# Altium PCB Booster_PA_OUT.PcbDoc
Units mm, origin at the board's own origin, x right, y up, seen from the top; angles counter-clockwise.
Board outline 79.5 x 29 mm, 2 copper layers (Top Layer, Bottom Layer), stack 1.071 mm thick; 94 components, 59 nets, 267 pads, 315 vias.
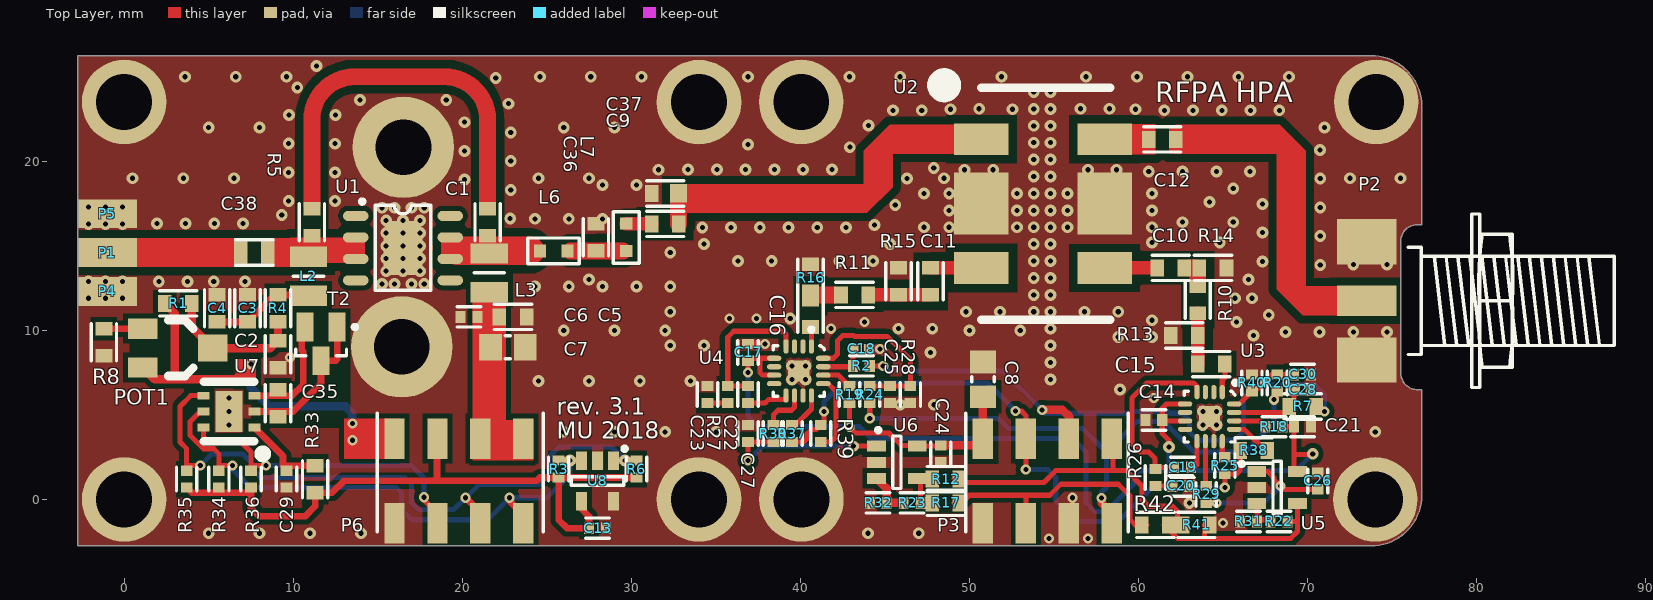
[diagram p0: Top Layer view]
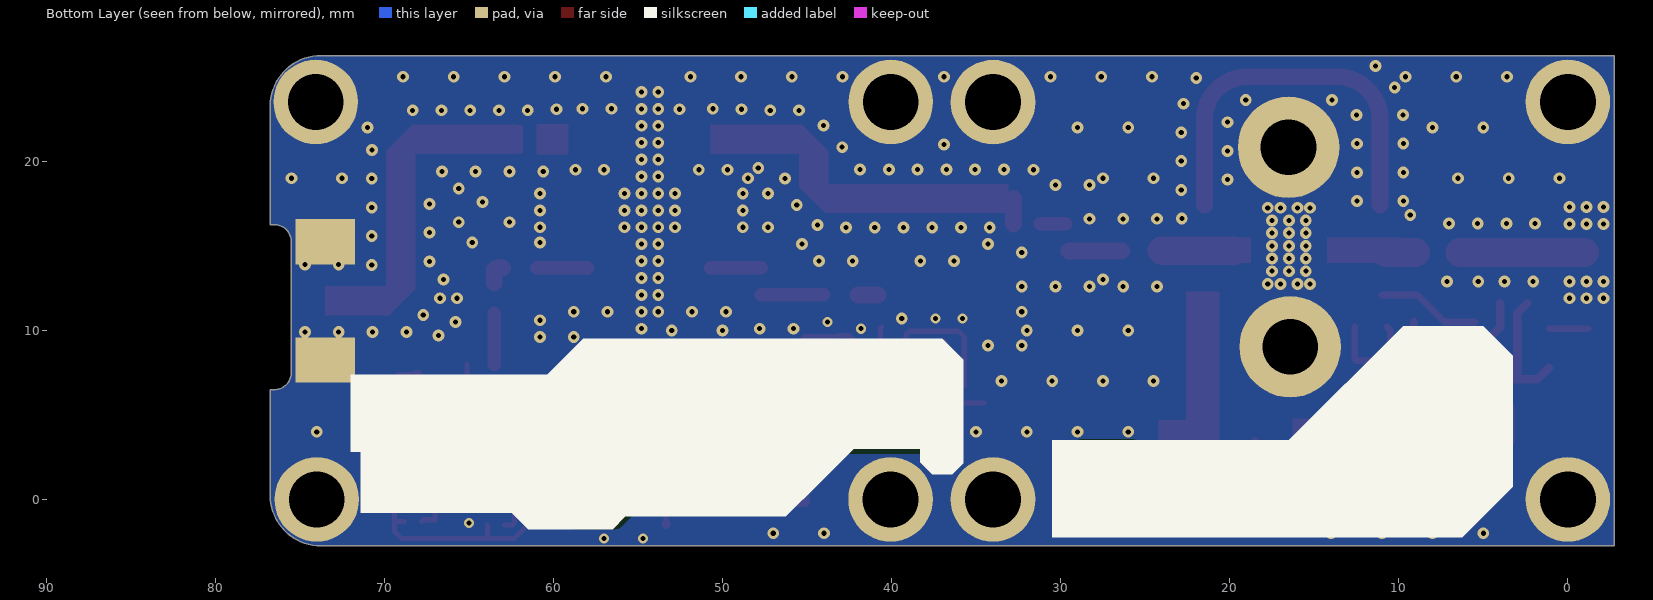
[diagram p1: Bottom Layer view, seen from below]

## Layer stack, top to bottom
Top Solder: solder mask 0.0102, Solder Resist, Dk 3.5
Top Layer: signal copper 0.0356
Dielectric 1: dielectric 1, FR408, Dk 3.67
Bottom Layer: signal copper 0.0356
Bottom Solder: solder mask 0.0102, Solder Resist, Dk 3.5

## Board outline
-2.75,-2.75 -2.75,26.25 73.75,26.25 cw(c73.75,23.25) 76.75,23.25 76.75,16.25 76.5,16.25 ccw(c76.5,15.25) 75.5,15.25 75.5,7.5 ccw(c76.5,7.5) 76.5,6.5 76.75,6.5 76.75,0.25 cw(c73.75,0.25) 73.75,-2.75

## Design rules (kind name [scope] priority, off if disabled: settings)
Clearance Clearance_50_Ohm [InNetClass('50_Ohm') vs InNet('GND')] p1: gap=0.5 ignorepadtopadclearanceinfootprint=FALSE
Clearance [All] p2: gap=0.3 ignorepadtopadclearanceinfootprint=FALSE
Height [All] p1: minheight=0 maxheight=30 prefheight=12.7
HoleSize [All] p1: absolutevalues=TRUE maxlimit=4 minlimit=0.025 maxpercent=80.000 minpercent=20.000
MinimumSolderMaskSliver [All] p1: minsoldermaskwidth=0.1
PolygonConnect [All] p1: connectstyle=Direct reliefconductorwidth=0.254 reliefentries=4 polygonreliefangle="90 Angle" airgapwidth=0.254
RoomDefinition Booster_PA_OUT [InComponentClass('Booster_PA_OUT')] p1: confinementstyle=ConfineIn formatcopy=TRUE lockcomponents=FALSE outline 76.5,27.5 -1,27.5 -1,-2 76.5,-2
RoutingVias [All] p1: holewidth=0.711 width=1.27 viastyle="Through Hole" minholewidth=0.711 minwidth=1.27 maxholewidth=0.711 maxwidth=1.27
SolderMaskExpansion [All] p1: expansion=0.102
Width Width_50_Ohm [InNetClass('50_Ohm')] p1: maxlimit=1.7 minlimit=0.3 preferedwidth=1.7 bottomlayer_minwidth=0 bottomlayer_maxwidth=0 bottomlayer_prefwidth=0 minimp=50.000000 maximp=50.000000 favimp=50.000000
Width [All] p2: maxlimit=2 minlimit=0.2 preferedwidth=0.5 minimp=50.000000 maximp=50.000000 favimp=50.000000
27 further rules are at their usual default settings.

## Classes and differential pairs
net class 50_Ohm: NetC1_1 NetC1_2 NetC9_1 NetC9_2 NetC10_1 NetC10_2 NetC11_1 NetC11_2 NetC12_1 NetC12_2 NetC15_2 NetC16_2 NetC36_2 NetC38_1 NetC38_2

## Components (designator, comment, footprint, x,y, rotation, side; value= is the part's Value field where it differs from the comment)
C1 "470p" 0603_ZE#1 21.5,16.4 r90 top
C2 "4.7u" 0603_ZE#1 9.1,8.6 r90 top
C3 "100n" 0603_ZE#1 7.3,11.3 r270 top
C4 "680p" 0603_ZE#1 5.5,11.3 r270 top
C5 "680p" 0603_ZE#1 23,10.8 r180 top
C6 "100n" 0402_ZE 20.4,10.8 r0 top
C7 "4.7u" chip_c_0805 22.7,9 r180 top
C8 "4.7u" chip_c_0805 50.8,7.1 r270 top
C9 "270p" 0603_ZE#1 32,16.3 r180 top
C10 "2.2n" 0603_ZE#1 61.9,13.7 r180 top
C11 "2.2n" 0603_ZE#1 47.7,12.9 r90 top
C12 "2.2n" 0603_ZE#1 61.4,21.3 r180 top
C13 "100n" 0402_ZE 28,-1.7 r180 top
C14 "100n" 0402_ZE 60.9,4.7 r0 top
C15 "2.2n" 0603_ZE#1 64.3,8 r180 top
C16 "2.2n" 0603_ZE#1 40.6,11 r90 top
C17 "100n" 0402_ZE 36.9,8.7 r270 top
C18 "47n" "CAPC1005X70N - 0402" 43.6,8.9 r0 top
C19 "100n" 0402_ZE 62.6,1.9 r0 top
C20 "100n" 0402_ZE 62.5,0.8 r0 top
C21 "100n" 0402_ZE 69.7,4.3 r180 top
C22 "100n" 0402_ZE 36.9,6.2 r270 top
C23 "100n" 0402_ZE 34.5,6.2 r90 top
C24 "100n" 0402_ZE 48.3,2.7 r90 top
C25 "100n" 0402_ZE 45.3,6.2 r90 top
C26 "100n" 0402_ZE 70.6,1.1 r270 top
C27 "100n" 0402_ZE 36.9,3.9 r270 top
C28 "47n" "CAPC1005X70N - 0402" 69.7,6.5 r0 top
C29 "100n" 0402_ZE 9.6,1.2 r90 top
C30 "dnm" 0402_ZE 69.7,7.4 r180 top
C35 "2.2n" 0603_ZE#1 9.1,5.7 r90 top
C36 "2.7p" 0603_ZE#1 27.9,15.5 r270 top
C37 "0.9p" 0603_ZE#2 32,18.1 r180 top
C38 "3.3n" 0603_ZE#3 7.7,14.6 r180 top
L2 "1uH 2% 1A" INDC2620X100N 10.9,13.2 r270 top
L3 "1uH 2% 1A" INDC2620X100N 21.6,13.4 r270 top
L6 "4.7nH" 0603_IND 25.4,14.7 r0 top
L7 "6.8nH" 0603_IND 29.7,15.5 r90 top
P1 "PAD" PAD_2x3_rect#1 -1,12.75 r90 top value=-
P2 "SMA Conn2" MOLEX_73251-2121 73.5,11.75 r180 top locked value=-
P3 "HDR2X4" HDR2X4_SMD 54.6,1.1 r90 top locked value=-
P4 "PAD" PAD_2x3_rect#2 0.75,11.5 r90 top value=-
P5 "PAD" PAD_2x3_rect#3 2.25,16.75 r90 top value=-
P6 "HDR2X4" HDR2X4_SMD 19.8,1.1 r90 top locked value=-
POT1 "5k" "Bourns 3314" 1.1,7.8 r90 top
R1 "dnm" 0603_ZE#1 3.2,11.6 r180 top
R2 "0" 0402_ZE 43.6,7.9 r0 top
R3 "10k" 0402_ZE 25.7,1.8 r90 top
R4 "38.3" 0603_ZE#1 9.1,11.3 r90 top
R5 "750" 0603_ZE#1 11.1,16.4 r90 top
R6 "10k" 0402_ZE 30.3,1.8 r90 top
R7 "dnm" 0603_ZE#1 69.7,5.5 r0 top
R8 "1.2k" 0603_ZE#1 -1.2,9.3 r90 top
R10 "249" 0603_ZE#1 63.5,11.8 r90 top
R11 "249" 0603_ZE#1 43.2,12.1 r180 top
R12 "dnm" 0603_ZE#1 48.6,1.2 r0 top
R13 "62" 0603_ZE#1 62.7,9.7 r180 top
R14 "62" 0603_ZE#1 64.4,13.7 r0 top
R15 "62" 0603_ZE#1 45.8,12.9 r90 top
R16 "62" 0603_ZE#1 40.6,13.1 r90 top
R17 "0" 0603_ZE#1 48.6,-0.2 r0 top
R18 "4.7k" 0402_ZE 68,4.3 r180 top
R19 "4.7k" 0402_ZE 42.9,6.2 r90 top
R20 "dnm" 0402_ZE 68.2,6.9 r90 top
R22 "10k" 0402_ZE 68.3,-1.3 r180 top
R23 "10k" 0402_ZE 46.6,-0.2 r180 top
R24 "4.7k" 0402_ZE 44.1,6.2 r90 top
R25 "dnm" 0402_ZE 65.1,2 r90 top
R26 "4.02" 0402_ZE 61,1.3 r90 top
R27 "4.02" 0402_ZE 35.7,6.2 r90 top
R28 "10k" 0402_ZE 46.5,6.2 r270 top
R29 "4.7k" 0402_ZE 64,0.3 r90 top
R30 "4.7k" 0402_ZE 38.4,3.9 r90 top
R31 "10k" 0402_ZE 66.5,-1.3 r180 top
R32 "10k" 0402_ZE 44.6,-0.2 r180 top
R33 "47" 0603_ZE#1 11.3,1.2 r90 top
R34 "10k" 0402_ZE 5.6,1.2 r90 top
R35 "10k" 0402_ZE 3.7,1.2 r90 top
R36 "10k" 0402_ZE 7.5,1.2 r90 top
R37 "0" 0402_ZE 39.5,3.9 r90 top
R38 "dnm" 0603_ZE#1 66.8,2.9 r0 top
R39 "dnm" 0402_ZE 41.2,3.9 r270 top
R40 "dnm" 0402_ZE 66.7,6.9 r90 top
R41 "0" 0603_ZE#1 63.4,-1.5 r180 top
R42 "dnm" 0603_ZE#1 61,-1.5 r180 top
T2 "SMBT3906" SOT23 11.65,9.2 r270 top value=-
U1 "NPTB00004A" SO8_RF_power 16.494,14.865 r0 top value=-
U2 "SYDC-20-62HP+" AH202_1 50.7,21.31 r270 top
U3 "ADL5904" QFN50P300X300X80-17N-S125 64.2,4.9 r270 top value=-
U4 "ADL5904" QFN50P300X300X80-17N-S125 39.9,7.6 r270 top value=-
U5 "LMV321M5X" SOT23-5_N 68.2,0.7 r0 top value=-
U6 "LMV321M5X" SOT23-5_N 45.7,2.2 r0 top value=-
U7 "MAX6642" TDFN-6 6.2,5.2 r180 top value=-
U8 "24AA01H" SOT23-5_N 28,1.1 r270 top

## Footprints (in the part's own frame and the unit in brackets; to place one, negate y for a bottom-side part, rotate by r counter-clockwise, add the part's x,y. Pads: shape width x height; smd on the part's side, far side on the other; paste and mask are expansions set on the pad)
0402_ZE [mm]
  rect 0.6x0.7 smd: 1(-0.5,0) 2(0.5,0)
  silkscreen extent -0.7,-0.6 0.7,0.6, body extent -0.5,-0.25 0.5,0.25, height 0.5
0603_IND [mil]
  rect 28x30 smd: 1(-31.89,0.14) 2(31.89,0.14)
  silkscreen extent -60,-30 60,30, body extent -32,-16 32,16, height 32
0603_ZE#1 [mm] "recommended by DESY ZE"
  rect 0.8x1 smd: 1(-0.8,0) 2(0.8,0)
  silkscreen extent -1.1,-0.75 1.1,0.75, body extent -0.8,-0.4 0.8,0.4, height 0.5
0603_ZE#2 [mm] "recommended by DESY ZE"
  rect 1x1.1 smd: 1(-0.8,0)
  rect 0.8x1 smd: 2(0.8,0)
  silkscreen extent -1.1,-0.75 1.1,0.75, body extent -0.8,-0.4 0.8,0.4, height 0.5
0603_ZE#3 [mm] "recommended by DESY ZE"
  rect 0.8x1.7 smd: 1(-0.8,0) 2(0.8,0)
  silkscreen extent -1.1,-0.75 1.1,0.75, body extent -0.8,-0.4 0.8,0.4, height 0.5
AH202_1 [mil] "Mini Circuits AH202_1 footprint"
  rect 74x127 smd mask+1.97: 1(0,287) 4(300,287) 5(300,0) 8(0,0)
  rect 144x127 smd mask+1.97: 2(150,287) 6(150,0)
  silkscreen extent -146,-107 420,300, body extent -103,-44 397,336, height 250
"Bourns 3314" [mm] "Bourns 3314 3,5mm x 5mm potentiometer case"
  rect 1.2x1.75 smd mask+0.09: 1(0,0) 3(2.3,0)
  rect 1.6x1.75 smd mask+0.09: 2(1.15,-4.15)
  silkscreen extent -0.5,-3 2.8,-1.5, body extent -0.05,-3.95 2.25,-0.25, height 2
"CAPC1005X70N - 0402" [mm] "Capacitor, Non-Polarized, Chip; 1.00mm L X 0.50mm W X 0.70mm H, IPC Medium Density"
  rect 0.6x0.6 smd: 1(-0.46,0) 2(0.46,0)
  body extent -0.6,-0.35 0.6,0.35, height 0.7
chip_c_0805 [mm] "Chip Capacitor, 2-Leads, Body 2,0x1,2mm (0805), IPC Low Density"
  rect 1.35x1.55 smd: 1(-1.025,0) 2(1.025,0)
  silkscreen extent -0.15,-0.67 0.15,0.67, body extent -1,-0.62 1,0.64, height 0.78
HDR2X4_SMD [mm]
  rect 2.4x1.2 smd: 1(-2.5,-3.81) 2(2.5,-3.81) 3(-2.5,-1.27) 4(2.5,-1.27) 5(-2.5,1.27) 6(2.5,1.27) 7(-2.5,3.81) 8(2.5,3.81)
  silkscreen extent -3,-4.79 4,4.83, body extent -3.65,-5.08 3.65,5.08, height 9.3
INDC2620X100N [mm] "Chip Inductor, EIA 1008, Metric 2520, Body 2.60mm L X 2.00mm W X 1.00mm H, IPC Medium Density"
  rect 1.2x2.2 smd: 1(-1.15,0) 2(1.15,0)
  silkscreen extent 0,-0.9 0,0.9, body extent -1.3,-1 1.3,1, height 1
MOLEX_73251-2121 [mm] "50 Ohm, SMA Edge Mount PCB, With Jam Nut And Lock Washer"
  rect 3.5x1.78 smd: 1(0,0)
  rect 3.5x2.665 smd: 2(0,3.492) 2(0,-3.492)
  rect 3.5x2.665 smd far side: 2(0,3.492) 2(0,-3.492)
  silkscreen extent -14.64,-5.13 -2.44,5.13, body extent -14.64,-5.13 1.62,5.13, height 5.76
PAD_2x3_rect#1 [mm] "pad pod gniazdka SMA wkrêcane w obudowy"
  rect 1.7x3.5 smd mask+0.03: 1(1.85,0)
PAD_2x3_rect#2 [mm] "pad pod gniazdka SMA wkrêcane w obudowy"
  rect 1.7x3.5 smd mask+0.03: 1(0.8,1.75)
PAD_2x3_rect#3 [mm] "pad pod gniazdka SMA wkrêcane w obudowy"
  rect 1.7x3.5 smd mask+0.03: 1(0.15,3.25)
QFN50P300X300X80-17N-S125 [mm] "QFN, 0.50mm pitch, square; 4 pin X 4 pin, 3mm X 3mm X 0.80mm H body (w/thermal tab 1.25 X 1.25mm),  IPC Medium Density"
  oval 0.85x0.3 smd mask+0.05: 1(-1.45,0.75) 2(-1.45,0.25) 3(-1.45,-0.25) 4(-1.45,-0.75) 9(1.45,-0.75) 10(1.45,-0.25) 11(1.45,0.25) 12(1.45,0.75)
  oval 0.3x0.85 smd mask+0.05: 5(-0.75,-1.45) 6(-0.25,-1.45) 7(0.25,-1.45) 8(0.75,-1.45) 13(0.75,1.45) 14(0.25,1.45) 15(-0.25,1.45) 16(-0.75,1.45)
  rect 1.25x1.25 smd mask+0.05: 17(0,0)
  silkscreen extent -2.12,-1.5 1.5,1.65, body extent -1.57,-1.57 1.58,1.58, height 0.8
SO8_RF_power [mm]
  oval 1.5x0.6 smd: 1(-2.794,1.905) 2(-2.794,0.635) 3(-2.794,-0.635) 4(-2.794,-1.905) 5(2.794,-1.905) 6(2.794,-0.635) 7(2.794,0.635) 8(2.794,1.905)
  rrect50% 2.3x3.2 smd mask+0.05: 9(0,0)
  silkscreen extent -2.54,-2.5 1.65,2.88, body extent -3.06,-2.45 3.04,2.45, height 1.7
SOT23 [mm] "SOT23, 3-Leads, Body 3,0x2,5mm (max), Pitch 0,95mm, IPC Low Density"
  rect 1.7x1 smd: 1(-1,0.95) 2(-1,-0.95) 3(1,0)
  silkscreen extent -1.12,-1.5 0.7,2.13, body extent -1.25,-1.5 1.25,1.5, height 1.01
SOT23-5_N [mm] "SOT23, 5-Leads, Body 2.9x1.6mm, Pitch 0.95mm, Lead Span 2.8mm, IPC Medium Density"
  rect 1.1x0.65 smd: 1(-1.2,0.95) 2(-1.2,0) 3(-1.2,-0.95) 4(1.2,-0.95) 5(1.2,0.95)
  silkscreen extent -2.22,-1.55 0.25,1.55, body extent -1.63,-1.5 1.57,1.5, height 1.1
TDFN-6 [mm] "for MAX6642 temperature sensor"
  rect 0.71x0.46 smd mask+0.05: 1(-1.5,0.94) 2(-1.5,0) 3(-1.5,-0.94) 4(1.5,-0.94) 5(1.5,0) 6(1.5,0.94)
  rect 1.6x2.4 smd mask+0.05: 7(0,0)
  silkscreen extent -2.25,-1.75 1.5,2.75, body extent -1.25,-1.25 1.25,1.25, height 1

## Part data
C1: library part C, "Capacitor", Manufacturer=Multicomp, Manufacturer Part Number=MCMT18N471F500CT, Package=0603, Supplier Part Number 1=1856153, Generic=yes, Mounting type=SMT, Remarks="Tolerance 1%", Supplier 1=Farnell, Supplier 2=-, Supplier 3=-, Supplier Part Number 2=-, Supplier Part Number 3=-
C2: library part C, "Capacitor", Manufacturer=Murata, Manufacturer Part Number=GRM188R61C475KAAJD, Package=0603, Supplier Part Number 1=2611924RL, Generic=yes, Mounting type=SMT, Remarks=-, Supplier 1=Farnell, Supplier 2=Mouser, Supplier 3=Digikey, Supplier Part Number 2=81-GRM188R61C475KAJD, Supplier Part Number 3=490-10481-1-ND
C3 C6 C13 C14 C17 C19 C20 C21 C22 C23 C24 C25 C26 C27 C29 C30: library part C, "Capacitor", Manufacturer=Murata, Manufacturer Part Number=GRM155R61H104KE19D, Package=0402, Supplier Part Number 1=81-GRM155R61H104KE9D, Generic=yes, Mounting type=SMT, Remarks=-, Supplier 1=Mouser, Supplier 2="Digi Key", Supplier 3=Farnell, Supplier Part Number 2=490-11917-1-ND, Supplier Part Number 3=2218856
C4 C5: library part C, "Capacitor", Manufacturer=Multicomp, Manufacturer Part Number=MCMT18N681F500CT, Package=0603, Supplier Part Number 1=1856154RL, Generic=yes, Mounting type=SMT, Remarks="Tolerance 1%", Supplier 1=Farnell, Supplier 2=-, Supplier 3=-, Supplier Part Number 2=-, Supplier Part Number 3=-
C7 C8: library part C, "Capacitor", Manufacturer=Murata, Manufacturer Part Number=GRT21BR61H475KE13L, Package=0805, Supplier Part Number 1=1856154RL, Generic=yes, Mounting type=SMT, Remarks=-, Supplier 1=Farnell, Supplier 2=Mouser, Supplier 3=Digikey, Supplier Part Number 2=81-GRT21BR61H475KE3L, Supplier Part Number 3=490-12394-1-ND
C9: library part C, "Capacitor", Manufacturer=Kemet, Manufacturer Part Number=C0603C271F5GACTU, Package=0603, Supplier Part Number 1=80-C0603C271F5G, Generic=yes, Mounting type=SMT, Remarks="Tolerance 1%", Supplier 1=Mouser, Supplier 2="Digi Key", Supplier 3=Farnell, Supplier Part Number 2=399-9054-1-ND, Supplier Part Number 3=2581060
C10 C11 C12 C15 C16: library part C, "Capacitor", Manufacturer=Murata, Manufacturer Part Number=GRM1885C1H222FA01D, Package=0603, Supplier Part Number 1=81-GRM1885C1H222FA1D, Generic=yes, Mounting type=SMT, Remarks=-, Supplier 1=Mouser, Supplier 2="Digi Key", Supplier 3=Farnell, Supplier Part Number 2=490-7768-1-ND, Supplier Part Number 3=2470481
C18 C28: library part Capacitor, "Capacitor", Manufacturer=-, Generic=yes, Manufacturer Part Number=-, Mounting type=SMT, Package=-, Remarks=-, Supplier 1=-, Supplier 2=-, Supplier 3=-, Supplier Part Number 1=-, Supplier Part Number 2=-, Supplier Part Number 3=-
C35: library part C, "Capacitor", Manufacturer=Murata, Manufacturer Part Number=GRM155R61H104KE19D, Package=0603, Supplier Part Number 1=81-GRM155R61H104KE9D, Generic=yes, Mounting type=SMT, Remarks=-, Supplier 1=Mouser, Supplier 2="Digi Key", Supplier 3=Farnell, Supplier Part Number 2=490-11917-1-ND, Supplier Part Number 3=2218856
C36: library part C, "Capacitor", Manufacturer=Murata, Manufacturer Part Number=GRM1885C1H2R7BA01D, Package=0603, Generic=yes, Mounting type=SMT, Remarks=-, Supplier 1=Mouser, Supplier 2="Digi Key", Supplier 3=Farnell, Supplier Part Number 3=2688510
C37: library part C, "Capacitor", Manufacturer=AVX, Manufacturer Part Number=ML03510R9AAT2A, Package=0603, Supplier Part Number 1=581-ML03510R9AAT2A, Generic=yes, Mounting type=SMT, Remarks="Tolerance 1%", Supplier 1=Mouser, Supplier 2="Digi Key", Supplier 3=-, Supplier Part Number 2=478-6731-1-ND, Supplier Part Number 3=-
C38: library part C, "Capacitor", Manufacturer=Kemet, Manufacturer Part Number=C0603C332F5GACTU, Package=0603, Generic=yes, Mounting type=SMT, Remarks=-, Supplier 1=Mouser, Supplier 2="Digi Key", Supplier 3=Farnell, Supplier Part Number 3=2581062
L2 L3: library part Inductor, Manufacturer=ABRACON, Manufacturer Part Number=AISC-1008-1R0G-T, Package=1008, Supplier Part Number 1=815-AISC10081R0GT, Generic=no, Mounting type=SMT, Remarks="Tolerance 2%", Supplier 1=Mouser, Supplier 2=-, Supplier 3=-, Supplier Part Number 2=-, Supplier Part Number 3=-
L6: library part Inductor, Manufacturer=Murata, Manufacturer Part Number=LQW18AN4N7G8ZD, Package=0603, Supplier Part Number 1=-, Generic=no, Mounting type=SMT, Remarks="Tolerance 2%", Supplier 1=-, Supplier 2=Mouser, Supplier 3=Digikey, Supplier Part Number 2=81-LQW18AN4N7G8ZD, Supplier Part Number 3=490-15710-1-ND
L7: library part Inductor, Manufacturer=Murata, Manufacturer Part Number=LQW18AN6N8G8ZD, Package=0603, Supplier Part Number 1=-, Generic=no, Mounting type=SMT, Remarks="Tolerance 2%", Supplier 1=-, Supplier 2=Mouser, Supplier 3=Digikey, Supplier Part Number 2=81-LQW18AN4N7G8ZD, Supplier Part Number 3=490-15733-1-ND
P1 P4 P5: Manufacturer=-, Generic=no, Manufacturer Part Number=-, Mounting type=-, Package=-, Remarks="PCB PAD", Supplier 1=-, Supplier 2=-, Supplier 3=-, Supplier Part Number 1=-, Supplier Part Number 2=-, Supplier Part Number 3=-
P2: "SMA Connector 142-0711-301", Manufacturer=Molex, Manufacturer Part Number=73251-2120, Package=SMA, Supplier Part Number 1=1909303, Generic=no, Mounting type=SMT, Remarks=-, Supplier 1=Farnell, Supplier 2=Mouser, Supplier 3=-, Supplier Part Number 2=538-73251-2120, Supplier Part Number 3=-
P3 P6: "Header, 4-Pin, Dual Row", Manufacturer=-, Package="2x4 pin SMD", Supplier Part Number 1=ZL264-8DG, Generic=yes, Manufacturer Part Number=-, Mounting type=SMT, Remarks="ordinary goldpin socket", Supplier 1=TME, Supplier 2=-, Supplier 3=-, Supplier Part Number 2=-, Supplier Part Number 3=-
POT1: library part Potentiometer, "Potentiometer", Manufacturer=Bourns, Manufacturer Part Number=-, Supplier Part Number 1=652-TC33X-2-502G, Generic=yes, Mounting type=SMT, Package=-, Remarks=-, Supplier 1=Mouser, Supplier 2=-, Supplier 3=-, Supplier Part Number 2=-, Supplier Part Number 3=-
R1 R2 R5 R7 R8 R12 R17 R25 R33 R37 R38 R39 R41 R42: library part R2, "Resistor", Manufacturer=-, Package=0603, Generic=yes, Manufacturer Part Number=-, Mounting type=SMT, Supplier 1=-, Supplier 2=-, Supplier 3=-, Supplier Part Number 1=-, Supplier Part Number 2=-, Supplier Part Number 3=-
  R1 R2 R7 R12 R17 R25 R37 R38 R39 R41 R42: Remarks="Debug resitor, to be placed in release version"
  R5 R8 R33: Remarks="Tolerance 1%"
R3 R6 R18 R19 R20 R22 R23 R24 R26 R27 R28 R29 R30 R31 R32 R34 R35 R36 R40: library part R2, "Resistor", Manufacturer=-, Package=0402, Generic=yes, Manufacturer Part Number=-, Mounting type=SMT, Remarks="Tolerance 1%", Supplier 1=-, Supplier 2=-, Supplier 3=-, Supplier Part Number 1=-, Supplier Part Number 2=-, Supplier Part Number 3=-
R4: library part R2, "Resistor", Manufacturer=Panasonic, Manufacturer Part Number=ERJPA3F38R3V, Package=0603, Supplier Part Number 1=2562009, Generic=no, Mounting type=SMT, Remarks="Power 250 mW", Supplier 1=Farnell, Supplier 2=Mouser, Supplier 3=Digikey, Supplier Part Number 2=667-ERJ-PA3F38R3V, Supplier Part Number 3=ERJ-PA3F38R3V-ND
R10 R11: library part R2, "Resistor", Manufacturer=Panasonic, Manufacturer Part Number=ERJPA3F2490V, Package=0603, Supplier Part Number 1=2561903, Generic=no, Mounting type=SMT, Remarks="Power 250 mW", Supplier 1=Farnell, Supplier 2=Mouser, Supplier 3=Digikey
R13 R14 R15 R16: library part R2, "Resistor", Manufacturer=Panasonic, Manufacturer Part Number=ERJPA3F62R0V, Package=0603, Generic=no, Mounting type=SMT, Remarks="Power 250 mW", Supplier 1=Mouser, Supplier 2="Digi Key", Supplier 3=Farnell, Supplier Part Number 3=2335940
T2: library part BC856, "PNP Bipolar Transistor", Manufacturer=Infineon, Manufacturer Part Number="SMBT 3906 E6327", Package=SOT-23, Supplier Part Number 1=726-SMBT3906E6327, Generic=no, Mounting type=SMD, Remarks=-, Supplier 1=Mouser, Supplier 2=Digikey, Supplier 3=-, Supplier Part Number 2=SMBT3906E6327HTSA1TR-ND, Supplier Part Number 3=-
U1: "GaN Wideband Transistor amplifier 28V, 5W, DC-6GHz", Manufacturer=Macom, Package="SO8 power pad", Supplier Part Number 1=937-NPTB00004A, Generic=no, Manufacturer Part Number=NPTB00004A, Mounting type=SMT, Remarks=-, Supplier 1=Mouser, Supplier 2=Digikey, Supplier 3=-, Supplier Part Number 2=1465-1410-ND, Supplier Part Number 3=-
U2: library part SYDC-10-62-HP+, "SMD Bi-directional coupler", Manufacturer="Mini Circuits", Package=AH202-1, Generic=no, Manufacturer Part Number=SYDC-20-62HP+, Mounting type=SMT, Remarks=-, Supplier 1=Municom, Supplier 2=-, Supplier 3=-, Supplier Part Number 1=SYDC-20-62HP+, Supplier Part Number 2=-, Supplier Part Number 3=-
U3 U4: "DC to 6 GHz 45dB TruPwr Detector with Envelope Threshold Detection", Manufacturer="Analog Devices", Package=LFCSP-16, Supplier Part Number 1=584-ADL5904ACPZN-R7, Generic=no, Manufacturer Part Number=ADL5904, Mounting type=SMT, Remarks=-, Supplier 1=Mouser, Supplier 2="Digi Key", Supplier 3=-, Supplier Part Number 2=ADL5904ACPZN-R7CT-ND, Supplier Part Number 3=-
U5 U6: "Single General Purpose Low voltage Rail to Rail Output Op amp", Manufacturer=TI, Package=SOT23-6, Supplier Part Number 1=926-LMV321M5X/NOPB, Generic=no, Manufacturer Part Number=LMV321M5X, Mounting type=SMT, Remarks=-, Supplier 1=Mouser, Supplier 2=Farnell, Supplier 3=Digikey, Supplier Part Number 2=2764711, Supplier Part Number 3=LMV321M5X/NOPBCT-ND
U7: "+/-1 degree SMBus-Compatible Remote/Local Temperature sensor with overtemperature alarm", Manufacturer=Maxim, Manufacturer Part Number=MAX6642ATT94+T, Package=DFN6, Supplier Part Number 1=2799245, Generic=no, Mounting type=SMT, Remarks=-, Supplier 1=Farnell, Supplier 2=Mouser, Supplier 3=Digikey, Supplier Part Number 2=700-MAX6642ATT94+T, Supplier Part Number 3=MAX6642ATT94+T-ND
U8: "1K I2  C™ Serial EEPROM with Half-Array Write-Protect", Manufacturer=Microchip, Manufacturer Part Number=-, Supplier Part Number 1=579-24AA01HTILT, Generic=no, Mounting type=SMT, Package=-, Remarks=-, Supplier 1=Mouser, Supplier 2=Farnell, Supplier 3=Digikey, Supplier Part Number 2=-, Supplier Part Number 3=24AA01HT-I/LTCT-ND

## Free pads (board coordinates)
  round 5 hole 3.3: 0(0,0) 1(74,0) 2(74.06,23.51) 3(0,23.51) 6(34,0) 7(34,23.5) 8(40.06,0) 9(40.05,23.51)
  round 6 hole 3.3: 4(16.42,9.03) 5(16.52,20.83)

## Via types
v1: diameter 0.7, hole 0.3, Top Layer to Bottom Layer, tented both sides, 278 vias
v2: diameter 0.6, hole 0.3, Top Layer to Bottom Layer, tented both sides, 37 vias

## Nets (pads, with @x,y where several pads share a name; then routed paths per layer and width w, separated by ;. In a path a pad name is that pad's centre, name@x,y a point inside that pad or via, vN(x,y) a via of type N, cw(c..) or ccw(c..) an arc to the next point about the centre after c; other vN are vias at no path point)
ALERT: P6.5 R36.2 U7.6 | length 17.3
  Top Layer w0.3: U7.6 4.7,3.7 4.9,3.5 6.8,3.5 7.5,2.8 7.5,2 v2(8.4,2) ; v2(17.73,0.13) 17.73,-0.03 P6.5@18.4,-0.7
  Bottom Layer w0.3: v2(8.4,2) 17,2 17.73,1.27 v2(17.73,0.13)
FWD_Q: P3.6 R25.1 R37.1 R38.1 R39.1 | length 37.9
  Top Layer w0.3: R37.1 40.2,3.4 40.4,3.6 40.4,3.886 40.664,4.15 40.95,4.15 R39.1 41.4,4.6 v2(41.4,5.2) ; v2(52.73,5.23) 53.07,5.23 53.33,4.97 P3.6 v2(53.33,1.77) ; v2(65.1,0.7) R25.1 65.8,1.5 66,1.7 66,2.4 66.3,2.7 R38.1@66.3,2.9
  Bottom Layer w0.3: v2(41.4,5.2) 41.4,5.8 42.5,6.9 51.06,6.9 v2(52.73,5.23) ; v2(53.33,1.77) 54.63,1.77 55.1,1.3 55.1,-0.1 56.3,-1.3 58.8,-1.3 60.8,0.7 v2(65.1,0.7)
FWD_RST: P3.4 R2.2 R7.2 | length 36.5
  Top Layer w0.3: R2.2 v2(44.9,7.9) ; R7.2@70.2,5.5 70.7,5.5 v2(71,5.2)
  Top Layer w0.5: v2(54.3,5.3) 55.5,5.3 55.9,4.9 P3.4@55.9,4.13
  Bottom Layer w0.3: v2(44.9,7.9) 45.2,7.6 52,7.6 v2(54.3,5.3) 54.5,5.1 59.551,5.1 59.651,5.2 61.749,5.2 61.849,5.1 62.6,5.1 63,4.7 63,4 63.5,3.5 65.7,3.5 66.2,4 66.2,6.1 66.9,6.8 70.4,6.8 71,6.2 v2(71,5.2)
FWD_VREF: P3.1 R20.1 R24.1 | length 33.8
  Top Layer w0.3: v2(44.1,4.8) R24.1 ; v2(68,5.9) 68.2,6.1 R20.1
  Top Layer w0.5: v2(57.81,0.09) 57.81,-0.21 P3.1@58.4,-0.8
  Bottom Layer w0.3: v2(44.1,4.8) 51.7,4.8 52.3,4.2 56.7,4.2 58.1,2.8 ; v2(57.81,0.09) 57.81,0.42 58.1,0.71 58.1,2.8 ; v2(68,5.9) 68,4.5 66.3,2.8 63.3,2.8 61.5,4.6 59.9,4.6 58.1,2.8
FWD_VRMS: P3.5 R17.2 R42.2 | length 15.4
  Top Layer w0.3: R17.2@49.1,-0.2 49.554,-0.2 50.004,0.25 53.3,0.25 ; P3.5 53.33,0.22 53.3,0.25 ; R42.2@60.5,-1.5 59.8,-1.5 59.5,-1.2 59.5,0.2 58.8,0.9 55.4,0.9 54.75,0.25 53.3,0.25
  Top Layer w0.5: P3.5@53.33,-1.5 P3.5
GND: C2.1 C3.1 C4.1 C5.1 C6.1 C7.1 C8.1 C13.1 C14.1 C17.1 C18.2 C20.2 C21.1 C23.2 C24.1 C25.1 C26.1 C27.1 C28.2 C29.1 C30.1 C35.1 C36.1 C37.2 P2.2 P3.3 P3.7 P4.1 P5.1 P6.7 pad.0 pad.1 pad.2 pad.3 pad.4 pad.5 pad.6 pad.7 pad.8 pad.9 R8.1 R13.2 R14.2 R15.2 R16.2 R28.2 R31.2 R32.2 R40.2 T2.1 T2.3 U1.9 U2.2 U2.6 U3.11 U3.17 U4.11 U4.17 U5.2 U6.2 U7.2 U7.7 U8.2 U8.5 | length 10.6
  Top Layer w0.4: U7.2 10,5.2 11.65,6.85 T2.3 12.5,8.2 12.6,8.3 T2.1 ; C17.1@36.9,9.3 37,9.2 v2(37.9,9.2) ; C18.2 v2(44.7,8.9)
  other v1: 5,-2 8,-2 11,-2 14,-2 44,-2 47,-2 63,-0.2 26,4 29,4 32,4 35,4 74,4 6.2,4.4 63.8,4.4 64.6,4.4 6.2,5.2 63.8,5.2 64.6,5.2 45.9,5.6 47.9,5.6 6.2,6 58.9,6.5 24.5,7 27.5,7 30.5,7 33.5,7 39.5,7.1 40.3,7.1 54.8,7.1 39.5,7.9 40.3,7.9 54.8,8.1 47.7,8.7 32.3,9.1 34.3,9.1 54.8,9.1 58.8,9.6 60.8,9.6 66.8,9.7 68.7,9.9 70.7,9.9 72.7,9.9 74.7,9.9 26,10 29,10 32,10 50,10 53,10 45.8,10.1 47.8,10.1 54.8,10.1 65.8,10.5 60.8,10.6 39.4,10.7 67.7,10.9 32.3,11.1 49.8,11.1 51.8,11.1 53.8,11.1 54.8,11.1 56.8,11.1 58.8,11.1 -2.1,11.9 -1.1,11.9 -0.1,11.9 65.7,11.9 66.7,11.9 53.8,12.1 54.8,12.1 24.3,12.6 26.3,12.6 28.3,12.6 30.3,12.6 32.3,12.6 15.25,12.75 16,12.75 17,12.75 17.75,12.75 2.051,12.885 3.751,12.885 7.151,12.885 -2.1,12.9 -1.1,12.9 -0.1,12.9 5.3,12.9 27.5,13 66.5,13 53.8,13.1 54.8,13.1 15.5,13.5 16.5,13.5 17.5,13.5 70.744,13.876 72.7,13.9 74.7,13.9 67.329,14.081 36.3,14.1 38.3,14.1 42.3,14.1 44.3,14.1 53.8,14.1 54.8,14.1 15.5,14.25 16.5,14.25 17.5,14.25 32.3,14.6 15.5,15 16.5,15 17.5,15 34.3,15.1 45.3,15.1 53.8,15.1 54.8,15.1 60.8,15.2 64.8,15.2 70.744,15.576 15.5,15.75 16.5,15.75 17.5,15.75 67.329,15.781 34.196,16.093 35.896,16.093 37.596,16.093 39.296,16.093 40.996,16.093 42.696,16.093 47.3,16.1 48.8,16.1 52.8,16.1 53.8,16.1 54.8,16.1 55.8,16.1 60.8,16.1 44.39,16.239 -2.1,16.3 -1.1,16.3 -0.1,16.3 1.935,16.315 3.635,16.315 5.335,16.315 7.035,16.315 62.6,16.4 65.6,16.4 15.5,16.5 16.5,16.5 17.5,16.5 24.3,16.6 26.3,16.6 28.3,16.6 22.833,16.613 9.322,16.828 48.8,17.1 52.8,17.1 53.8,17.1 54.8,17.1 55.8,17.1 60.8,17.1 15.25,17.25 16,17.25 17,17.25 17.75,17.25 70.744,17.276 -2.1,17.3 -1.1,17.3 -0.1,17.3 45.608,17.425 67.329,17.481 64.2,17.6 9.733,17.646 12.467,17.643 47.3,18.1 48.8,18.1 52.8,18.1 53.8,18.1 54.8,18.1 55.8,18.1 60.8,18.1 22.867,18.312 65.6,18.4 28.3,18.6 30.3,18.6 20.133,18.915 46.307,18.975 70.744,18.976 0.5,19 3.5,19 6.5,19 24.5,19 27.5,19 48.5,19 72.5,19 75.5,19 53.8,19.1 54.8,19.1 12.467,19.343 9.733,19.346 60.6,19.4 62.6,19.4 64.6,19.4 66.6,19.4 31.6,19.5 33.358,19.507 35.058,19.507 36.758,19.507 38.458,19.507 40.158,19.507 41.858,19.507 49.7,19.5 51.4,19.5 57,19.5 58.7,19.5 47.887,19.603 22.867,20.012 53.8,20.1 54.8,20.1 20.133,20.615 70.738,20.676 42.92,20.835 36.9,21 12.467,21.043 9.733,21.046 53.8,21.1 54.8,21.1 22.867,21.712 5,22 8,22 26,22 29,22 71,22 53.8,22.1 54.8,22.1 44.03,22.122 20.133,22.315 9.753,22.746 12.503,22.743 45.475,23.017 47.175,23.017 61.524,23.017 63.224,23.017 64.924,23.017 66.624,23.017 68.324,23.017 48.874,23.079 52.535,23.078 53.8,23.1 54.8,23.1 59.825,23.078 50.574,23.107 56.572,23.107 58.272,23.107 22.741,23.407 13.951,23.633 19.051,23.627 53.8,24.1 54.8,24.1 10.242,24.374 21.978,24.927 3.6,25 6.6,25 9.6,25 24.6,25 27.6,25 30.6,25 36.9,25 42.9,25 45.9,25 48.9,25 51.9,25 56.9,25 59.9,25 62.9,25 65.9,25 68.9,25 11.377,25.639
  other v2: 54.7,-2.3 57,-2.3 65,-1.4 56.1,0.1 60.9,6 9.8,8.4 41.8,10.1 43.8,10.5 35.8,10.7 37.4,10.7
NetC1_1: C1.1 L3.1 L6.1 U1.6 U1.7 | length 4.3
  Top Layer w1.7: 19.7,14.704 24,14.704
NetC1_2: C1.2 R5.2 | length 23.4
  Top Layer w1: R5.2@11.1,17.4 11.1,22.46 cw(c13.64,22.46) 13.64,25 18.96,25 cw(c18.96,22.46) 21.5,22.46 C1.2@21.5,17.4
NetC2_2: C2.2 POT1.2 R1.1 R4.1 | length 8.3
  Top Layer w0.5: R1.1 4,10.2 POT1.2 8.65,8.95 C2.2 R4.1
NetC3_2: C3.2 C4.2 L2.2 R4.2 | length 6.2
  Top Layer w0.4: C4.2 C3.2 7.307,10.5 8.3,11.493 8.3,11.5 8.9,12.1 R4.2 9.11,12.09 L2.2@10.996,12.09
NetC9_1: C9.1 C37.1 U2.8 | length 1.5
  Top Layer w1: C9.1 C37.1@32.8,17.8
NetC9_2: C9.2 L7.2 | length 1.5
  Top Layer w0.8: L7.2 31.19,16.31 C9.2
NetC10_1: C10.1 R10.2 R14.1 | length 1.1
  Top Layer w1: C10.1@63,13.7 R14.1@63.3,13.7 ; R10.2@63.5,12.8 R14.1@63.5,13.6
NetC10_2: C10.2 U2.4 | length 3
  Top Layer w0.8: U2.4 57.99,13.7 C10.2@61,13.7
NetC11_1: C11.1 R11.1 R15.1 | length 3.7
  Top Layer w0.8: R11.1 C11.1
NetC11_2: C11.2 U2.5 | length 3
  Top Layer w0.8: C11.2 50.7,13.7 U2.5
NetC12_1: C12.1 P2.1
NetC12_2: C12.2 U2.1
NetC15_1: C15.1 U3.1 | length 1.7
  Top Layer w0.3: U3.1 64.95,7.05 65.1,7.2 C15.1
NetC15_2: C15.2 R10.1 R13.1 | length 3
  Top Layer w0.8: C15.2 R13.1 R10.1
NetC16_1: C16.1 U4.1 | length 1.2
  Top Layer w0.3: C16.1 40.65,10.15 U4.1
NetC16_2: C16.2 R11.2 R16.1 | length 1.2
  Top Layer w1: R16.1@40.8,12.1 42,12.1
NetC18_1: C18.1 R2.1 U4.15 | length 2.8
  Top Layer w0.3: U4.15 43.05,7.85 R2.1 43.1,8.86 C18.1
NetC19_1: C19.1 R26.2 U3.4 | length 10.9
  Top Layer w0.3: C19.1 60.968,1.9 60.968,2.432 60.6,2.8 60.1,2.8 59.6,3.3 59.6,6 60.5,6.9 63.25,6.9 63.45,6.7 U3.4 U3.4@63.45,6.15
NetC19_2: C19.2 U3.9 | length 1.6
  Top Layer w0.3: C19.2@63.3,1.9 63.45,2.05 U3.9
NetC20_1: C20.1 R26.1 | length 0.8
  Top Layer w0.3: R26.1@61.2,0.8 C20.1
NetC22_1: C22.1 R27.2 U4.4 | length 8.5
  Top Layer w0.3: C22.1 R27.2 35.7,9.6 36.05,9.95 38.95,9.95 39.15,9.75 U4.4
NetC22_2: C22.2 U4.9 | length 2.6
  Top Layer w0.3: C22.2 37.9,5.7 38.1,5.9 39.15,5.9 U4.9
NetC23_1: C23.1 R27.1 | length 1.2
  Top Layer w0.3: C23.1 R27.1
NetC25_2: C25.2 R24.2 R28.1 U4.16 | length 10.8
  Top Layer w0.3: U4.16 41.95,8.35 42.2,8.6 42.2,9.4 42.5,9.7 43.139,9.7 43.189,9.65 45.119,9.65 45.469,9.3 45.5,9.3 46.5,8.3 R28.1 C25.2 R24.2
NetC26_2: C26.2 R29.1 U5.1 | length 9.1
  Top Layer w0.3: R29.1 v2(64.6,-0.2) ; U5.1@66.8,1.65 U5.1 67.65,1.65 68,1.3 68,1.2 v2(68.4,0.8) 68.6,0.6 C26.2
  Bottom Layer w0.3: v2(64.6,-0.2) 67.4,-0.2 v2(68.4,0.8)
NetC27_2: C27.2 R30.1 U6.1 | length 10.6
  Top Layer w0.3: v2(36.9,2.3) C27.2 R30.1 ; v2(43.15,3.15) U6.1
  Bottom Layer w0.3: v2(36.9,2.3) 37.75,3.15 v2(43.15,3.15)
NetC28_1: C28.1 R7.1 U3.15 | length 4.8
  Top Layer w0.3: U3.15 68.85,5.15 69.2,5.5 69.2,6.56 C28.1@69.24,6.6
NetC29_2: C29.2 R33.2 U7.1 | length 4.9
  Top Layer w0.4: U7.1 9.4,2.56 9.4,2 R33.2
NetC30_2: C30.2 R20.2 R40.1 U3.16 | length 4.5
  Top Layer w0.3: U3.16 65.95,5.65 R40.1@66.8,6.5 ; R40.1@66.7,6.5 R40.1@66.8,6.5 ; C30.2 R20.2 68.2,7.5 67.986,7.5 66.986,6.5 R40.1@66.8,6.5
NetC35_2: C35.2 T2.2 U7.3 | length 6.7
  Top Layer w0.4: U7.3 9.94,6.14 10.6,6.8 10.6,8.731 10.5,8.831 10.5,10 T2.2
NetC36_2: C36.2 L6.2 L7.1 | length 3.1
  Top Layer w1: L6.2@26.4,14.704 27.896,14.704 C36.2 27.904,14.704 L7.1@29.5,14.704
NetC38_1: C38.1 L2.1 R5.1 U1.2 U1.3 | length 1.8
  Top Layer w1.7: 9,14.6 L2.1@10.75,14.6
NetC38_2: C38.2 P1.1 | length 7.4
  Top Layer w1.7: P1.1 6.4,14.6
NetPOT1_3: POT1.3 R8.2 | length 2.3
  Top Layer w0.4: R8.2 POT1.3
NetR12_1: R12.1 R17.1 R23.1 U6.4 | length 3.8
  Top Layer w0.3: R17.1@48.1,-0.2 R23.1 47.1,1.05 U6.4 48.05,1.25 R12.1@48.1,1.2
NetR18_2: R18.2 U3.14 | length 1.7
  Top Layer w0.3: U3.14 67.15,4.65 R18.2@67.3,4.5
NetR19_2: R19.2 U4.14 | length 1.8
  Top Layer w0.3: U4.14 42.25,7.35 R19.2
NetR22_1: R22.1 R41.1 R42.1 U5.4 | length 11.4
  Top Layer w0.3: R42.1@61.5,-1.5 62.3,-2.3 63.9,-2.3 ; R41.1@63.9,-1.5 63.9,-2.3 ; R22.1 69.4,-1.3 ; U5.4 69.4,-1.3 ; 63.9,-2.3 69,-2.3 69.4,-1.9 69.4,-1.3
NetR22_2: R22.2 R31.1 U5.3 | length 1.8
  Top Layer w0.3: U5.3 67,-1.2 67.7,-1.2 R22.2
NetR23_2: R23.2 R32.1 U6.3 | length 2.7
  Top Layer w0.5: U6.3 45.1,0.65 R32.1 R23.2
NetR25_2: R25.2 U3.12 | length 1
  Top Layer w0.3: U3.12 64.95,2.65 R25.2
NetR29_2: R29.2 U3.10 | length 2.7
  Top Layer w0.3: R29.2@63.95,0.8 U3.10 ; R29.2 R29.2@64.05,0.85
NetR30_2: R30.2 U4.10 | length 2.7
  Top Layer w0.3: R30.2 38.4,5 38.675,5.275 39.475,5.275 39.65,5.45 U4.10
NetR37_2: R37.2 U4.12 | length 2.2
  Top Layer w0.3: R37.2@39.6,4.4 39.7,4.4 40.65,5.35 U4.12
NetR38_2: R38.2 U3.13 | length 2.3
  Top Layer w0.3: U3.13 66.25,4.15 67.3,3.1 R38.2@67.3,2.9
NetR39_2: R39.2 U4.13 | length 4.7
  Top Layer w0.3: R39.2 41.8,3.4 42.1,3.7 42.1,6.4 41.65,6.85 U4.13
P3V3: C13.2 P6.6 R3.1 R6.1 R33.1 R34.1 R35.1 R36.1 U8.4 | length 37.9
  Top Layer w0.4: R35.1 4,0.4 7.5,0.4 7.5,-0.5 8,-1 10.7,-1 11.3,-0.4 R33.1 12.3,0.4 13,1.1 18.5,1.1 ; P6.6@18.5,3.5 18.5,1.1 ; U8.4 27.05,-0.55 27.5,-1 C13.2 26.2,-1.7 25.7,-1.2 R3.1 ; R6.1 R3.1 ; 18.5,1.1 24.4,1.1 24.6,1.3 R3.1
P3V3A: C8.2 C14.2 C17.2 C21.2 C24.2 P3.8 R18.1 R19.1 U3.5 U3.7 U4.5 U4.7 U5.5 U6.5 | length 69.6
  Top Layer w0.3: v2(36.9,7.5) C17.2 36.9,8.3 36.95,8.35 37.6,8.35 ; U4.7 37.75,7.35 37.6,7.5 37.6,8.35 ; U4.5 37.6,8.35 ; R19.1 v2(42.9,4.3) 43.275,3.925 45.236,3.925 45.961,3.2 46.85,3.2 U6.5 48.25,3.15 C24.2 ; v1(61.8,3.1) 61.8,3.5 61.4,3.9 C14.2 ; U3.7 61.45,4.65 C14.2 ; U3.5 61.65,5.65 61.4,5.4 C14.2 ; R18.1 C21.2 69.2,2.65 ; U5.5 69.2,1.85 69.2,2.65 ; v1(70.3,2.7) 70.25,2.65 69.2,2.65
  Top Layer w0.5: C24.2 50.49,3.2 50.79,3.5 P3.8 50.79,6.065 C8.2
  Bottom Layer w0.3: v2(36.9,7.5) 36.9,4.9 37.5,4.3 v2(42.9,4.3) 43.5,4.3 44.2,3.6 56.1,3.6 56.9,2.8 56.9,-0.2 57.4,-0.7 58.1,-0.7 59.7,0.9 59.7,1.3 60.1,1.7 61.8,1.7 ; v1(61.8,3.1) 61.8,1.7 ; v1(70.3,2.7) 69.3,1.7 61.8,1.7
RET_VRMS: P3.2 R12.2 R41.2 | length 18.3
  Top Layer w0.3: R12.2@49.1,1.2 49.3,1 54.4,1 55.1,1.7 58.5,1.7 ; P3.2 58.5,3.51 58.5,1.7 ; R41.2@62.9,-1.5 62.4,-1.5 62.3,-1.4 62.3,-0.7 62,-0.4 60.6,-0.4 60.2,0 60.2,0.8 59.3,1.7 58.5,1.7
SCK: P6.3 R6.2 R35.2 U7.4 U8.1 | length 38.9
  Top Layer w0.3: v2(4.5,2) 3.7,2 3.7,3 3.3,3.4 3.3,5.5 3.94,6.14 U7.4
  Top Layer w0.4: v2@20.27,0.03 P6.3@21.2,-0.9 ; U8.1 v1(29.625,2.3) R6.2
  Bottom Layer w0.3: v2(4.5,2) 5.2,2.7 7,2.7 7.6,2.1 7.6,1.8 8.1,1.3 16.6,1.3 17,0.9 17,-0.2 17.4,-0.6 19.5,-0.6 v2(20.2,0.1) 21,0.9 24.6,0.9 25.1,1.4 25.1,2.5 25.7,3.1 28.825,3.1 v1(29.625,2.3)
SDA: P6.1 R3.2 R34.2 U7.5 U8.3 | length 32.4
  Top Layer w0.3: U7.5 4.5,5.2 3.9,4.6 3.9,3.793 4.693,3 5.3,3 5.6,2.7 5.6,2 v2(6.4,2)
  Top Layer w0.4: v2(22.8,0.1) 22.81,0.09 22.81,-0.11 P6.1@23.8,-1.1 ; R3.2 v1(26.375,2.3) U8.3
  Bottom Layer w0.3: v2(6.4,2) 6.4,1.8 7.5,0.7 16.1,0.7 16.4,0.4 16.4,-0.6 17,-1.2 21.5,-1.2 v2(22.8,0.1) 25,0.1 26.375,1.475 v1(26.375,2.3)
VCC_PWR_AMP_IN: P6.8 POT1.1 R1.2 | length 24.1
  Top Layer w0.5: POT1.1 1.8,7.1 3.05,7.1 ; R1.2 3,11 3,7.15 3.05,7.1 ; v2(7.5,8) 6.6,7.1 3.05,7.1 ; v2(13.5,4.5) v2(13.5,3.5) 15.19,3.5
  Bottom Layer w0.5: v2(7.5,8) 7.5,6.6 8.6,5.5 13.1,5.5 13.5,5.1 v2(13.5,4.5) v2(13.5,3.5)
VCC_PWR_AMP_OUT: C5.2 C6.2 C7.2 L3.2 P6.2 P6.4
pads on no net: U1.1 U1.4 U1.5 U1.8 U3.2 U3.3 U3.6 U3.8 U4.2 U4.3 U4.6 U4.8

## Polygon pours and split planes (outlines as drawn)
GND on Bottom Layer "GND_BOTTOM" (solid, remove dead copper, pour order 0): -2.75,-2.75 -2.75,26.25 73.75,26.25 cw(c73.75,23.25) 76.75,23.25 76.75,15.5 76.5,15.5 ccw(c76.5,14.5) 75.5,14.5 75.5,7.5 ccw(c76.5,7.5) 76.5,6.5 76.75,6.5 76.75,0.25 cw(c73.75,0.25) 73.75,-2.75
GND on Top Layer "GND_TOP" (solid, remove dead copper, pour order 2): -2.75,-2.75 -2.75,26.25 73.75,26.25 cw(c73.75,23.25) 76.75,23.25 76.75,15.5 76.5,15.5 ccw(c76.5,14.5) 75.5,14.5 75.5,7.5 ccw(c76.5,7.5) 76.5,6.5 76.75,6.5 76.75,0.25 cw(c73.75,0.25) 73.75,-2.75

## Other copper
Top Layer:
  rectangle net NetC12_1: 61.8,20.45 62.2,22.15
  rectangle net VCC_PWR_AMP_IN: 6.6,6.8 7.8,8.3
  rectangle net VCC_PWR_AMP_OUT: 20.6,2.3 24.2,4.7
  rectangle net VCC_PWR_AMP_IN: 13,2.4 16.3,4.8
  rectangle net NetC12_2: 59.1,20.4 61,22.2
  rectangle net NetC38_1: 9.8,14 14.25,15.5
  region net NetC1_1: 22.3,15.5 18.75,15.5 18.75,14 22.3,14
  rectangle net VCC_PWR_AMP_OUT: 20.6,2.3 22.6,12.3
  pour cut-out: 23,13.15 23,13.3 ccw(c22.3,13.3) 22.3,14 21,14 ccw(c21,13) 20,13
  pour cut-out: 75.5,14 75.5,15.25 cw(c76.5,15.25) 76.5,16.25 76.75,16.25 76.75,14
  region net NetC12_1: 69.879,20.62 69.879,20.45 69.879,12.6 73.5,12.6 73.5,10.9 69.879,10.9 69.709,10.9 68.179,12.43 68.179,12.6 68.179,20.45 62.2,20.45 62.2,22.15 68.349,22.15
  pour cut-out: 0.3,10.6 0.3,7.3 5.8,7.3 5.8,10.6
  pour cut-out: 7.5,4.2 13.4,4.2 13.4,11.3 11.9,11.3 11.9,9.2 11,9.2 11,6.6 7.5,6.6
  region net NetC9_1: 50.7,20.46 45.45,20.46 45.45,18.48 43.92,16.95 33.1,16.95 33.1,18.65 43.75,18.65 43.75,20.46 43.75,20.63 45.28,22.16 50.7,22.16
  pour cut-out: 6.4,15.962 9.2,15.962 9.2,13.238 6.4,13.238
Bottom Layer:
  pour cut-out: 75.5,14 75.5,15.25 cw(c76.5,15.25) 76.5,16.25 76.75,16.25 76.75,14

## Silkscreen, mask and mechanical layers (free items; w line width, h text height)
Top Overlay:
  text "RFPA HPA" at 61,23.5 h1.2
  text "rev. 3.1" at 25.6,5 h1
  text "MU 2018" at 25.6,3.6 h1
Bottom Overlay:
  rectangle: 70.7,2.8 72,7.4
  rectangle: 59.5,-0.8 71.4,7.4
  region: 35.75,4.5 35.75,2.15 36.4,1.5 37.6,1.5 38.3,2.2 38.3,3.8
  region: 35.75,8.25 35.75,4.5 37.25,3 42.25,3 44.25,1 46.25,-1 55.75,-1 56.5,-1.75 61.5,-1.75 62.75,-0.5 62.75,5 58.25,9.5 37,9.5
  region: 3.25,0.75 6.25,-2.25 30.5,-2.25 30.5,3.5 16.5,3.5 9.75,10.25 5,10.25 3.25,8.5
Bottom Solder:
  rectangle: 34.3,-3 40.3,1.3
  rectangle: 63.5,-3 72.6,1.5
  rectangle: 71.6,-3 77.5,8
  rectangle: 31,-3 35,12
  rectangle: 1.5,11.5 77.5,27.75
  rectangle: 63.5,7.5 77.5,27.75
  rectangle: -3.75,-3.75 2.5,27.75
  region: 12.75,12 12.75,8 16.75,4 31.9,4 31.9,12.7 31.012,13.588
Mechanical 1:
  lines w0.5: -2.75,-2.75 73.75,-2.75 ccw(c73.75,0.25) 76.75,0.25 76.75,6.5 76.5,6.5 cw(c76.5,7.5) 75.5,7.5 75.5,15.25 cw(c76.5,15.25) 76.5,16.25 76.75,16.25 76.75,23.25 ccw(c73.75,23.25) 73.75,26.25 -2.75,26.25 -2.75,-2.75 ; 0,26.25 ccw(c0,26.25) 0,26.25